# Altium PCB Attenuverter_v1_PCB.PcbDoc
Units mm, origin at the board's own origin, x right, y up, seen from the top; angles counter-clockwise.
Board outline 34 x 105 mm, 2 copper layers (Top Layer, Bottom Layer); 50 components, 34 nets, 149 pads, 66 vias.
Unrouted connection lines stored in the file: 2.
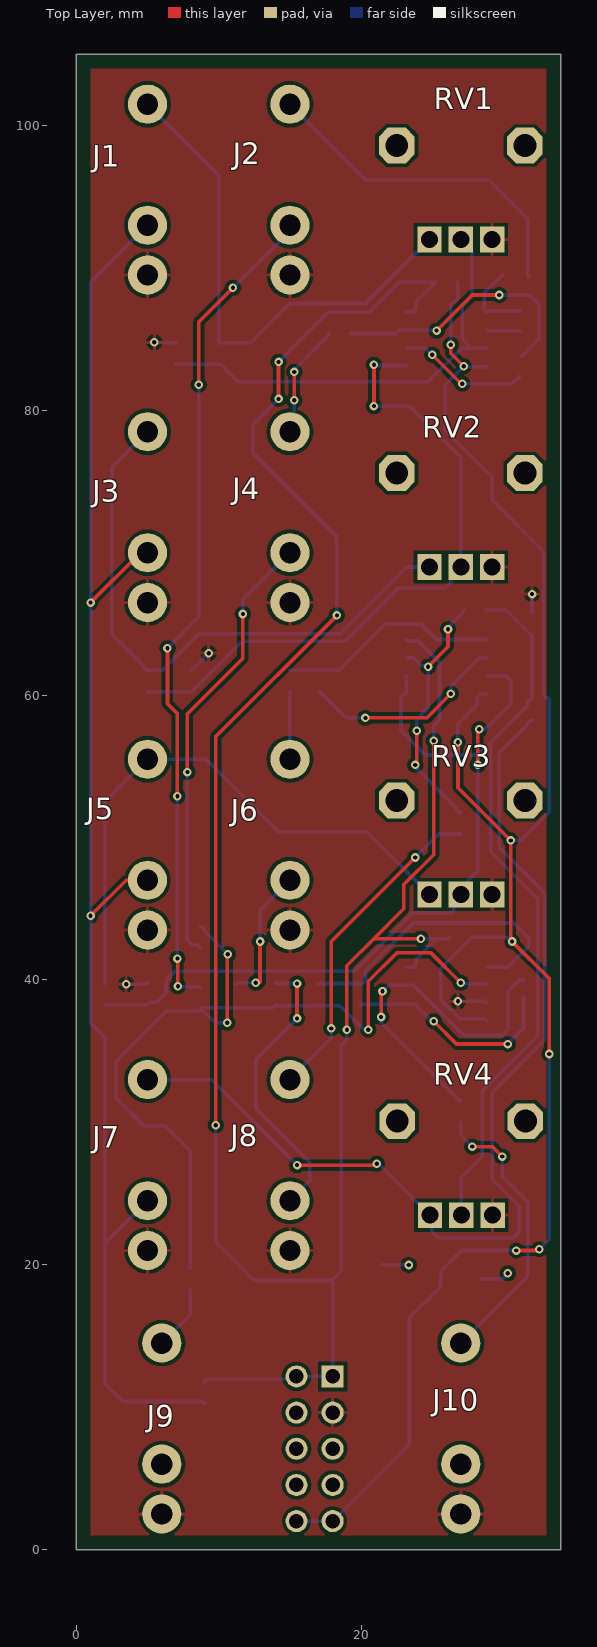
[diagram p0: Top Layer view]
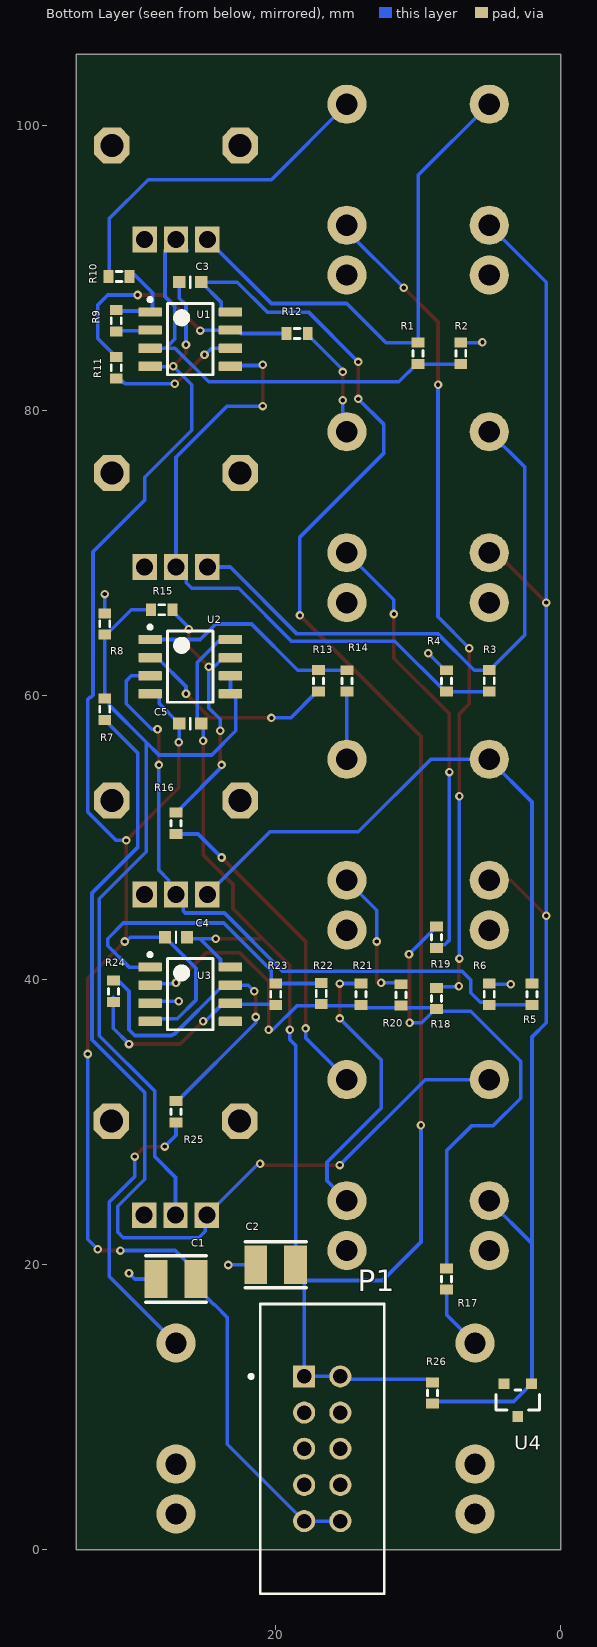
[diagram p1: Bottom Layer view, seen from below]

## Layer stack, top to bottom
Top Solder: solder mask 0.0102, Solder Resist, Dk 3.5
Top Layer: signal copper 0.0356
Dielectric 1: dielectric 0.32, FR-4, Dk 4.8
Bottom Layer: signal copper 0.0356
Bottom Solder: solder mask 0.0102, Solder Resist, Dk 3.5

## Board outline
0,0 0,105 34,105 34,0

## Design rules (kind name [scope] priority, off if disabled: settings)
Clearance [All] p1: gap=0.254 ignorepadtopadclearanceinfootprint=FALSE except(0: Arc-Hole Track-Hole SMDPad-Hole THPad-Hole Via-Hole Fill-Hole Poly-Hole Region-Hole Text-Hole)
PolygonConnect [All] p1: connectstyle=Relief reliefconductorwidth=0.254 reliefentries=4 polygonreliefangle="90 Angle" airgapwidth=0.254
RoutingVias [All] p1: holewidth=0.711 width=1.27 viastyle="Through Hole" minholewidth=0.711 minwidth=1.27 maxholewidth=0.711 maxwidth=1.27
SolderMaskExpansion [All] p1: expansion=0.102 istentingtop=FALSE
Width [All] p1: maxlimit=0.254 minlimit=0.254 preferedwidth=0.254
30 further rules are at their usual default settings.

## Components (designator, comment, footprint, x,y, rotation, side; value= is the part's Value field where it differs from the comment)
C1 "Cap Pol1" SMD-1210C 27,19 r180 bottom value=10u
C2 "Cap Pol1" SMD-1210C 20,20 r0 bottom value=10u
C3 "Cap" SMD-0603C 26,89 r270 bottom value=100n
C4 "Cap" SMD-0603C 27,43 r270 bottom value=100n
C5 "Cap" SMD-0603C 26,58 r270 bottom value=100n
J1 "Audio Jack" "Audio Jack" 5,101.5 r180 top
J2 "Audio Jack" "Audio Jack" 15,101.5 r180 top
J3 "Audio Jack" "Audio Jack" 5,78.5 r180 top
J4 "Audio Jack" "Audio Jack" 15,78.5 r180 top
J5 "Audio Jack" "Audio Jack" 5,55.5 r180 top
J6 "Audio Jack" "Audio Jack" 15,55.5 r180 top
J7 "Audio Jack" "Audio Jack" 5,33 r180 top
J8 "Audio Jack" "Audio Jack" 15,33 r180 top
J9 "Audio Jack" "Audio Jack" 6,14.5 r180 top
J10 "Audio Jack" "Audio Jack" 27,14.5 r180 top
P1 "1-1634688-0" TECO-1-1634688-0-10_V 16.73,7.08 r270 bottom
R1 "Res3" J1-0603 10,84 r90 bottom value=47K
R2 "Res3" J1-0603 7,84 r270 bottom value=47K
R3 "Res3" J1-0603 5,61 r90 bottom value=47K
R4 "Res3" J1-0603 8,61 r270 bottom value=47K
R5 "Res3" J1-0603 2,39 r90 bottom value=47K
R6 "Res3" J1-0603 5,39 r270 bottom value=47K
R7 "Res3" J1-0603 32,59 r270 bottom value=47K
R8 "Res3" J1-0603 32,65 r270 bottom value=47K
R9 "Res3" J1-0603 31.2,86.3 r90 bottom value=100K
R10 "Res3" J1-0603 31,89.4 r0 bottom value=1K
R11 "Res3" J1-0603 31.2,83 r90 bottom value=100K
R12 "Res3" J1-0603 18.5,85.4 r180 bottom value=1K
R13 "Res3" J1-0603 17,61 r90 bottom value=100K
R14 "Res3" J1-0603 15,61 r270 bottom value=1K
R15 "Res3" J1-0603 28,66 r180 bottom value=100K
R16 "Res3" J1-0603 27,51 r270 bottom value=1K
R17 "Res3" J1-0603 8,19 r90 bottom value=100K
R18 "Res3" J1-0603 8.7,38.7 r270 bottom value=100K
R19 "Res3" J1-0603 8.7,43 r90 bottom value=100K
R20 "Res3" J1-0603 11.2,38.95 r270 bottom value=100K
R21 "Res3" J1-0603 14,39 r270 bottom value=100K
R22 "Res3" J1-0603 16.8,39.05 r90 bottom value=100K
R23 "Res3" J1-0603 20,39 r270 bottom value=100K
R24 "Res3" J1-0603 31.4,39.2 r90 bottom value=100K
R25 "Res3" J1-0603 27,30.75 r270 bottom value=1K
R26 "Res3" J1-0603 9,11 r90 bottom value=4.7K
RV1 "RPot" RPOT 27,92 r0 top value=100K
RV2 "RPot" RPOT 27,69 r0 top value=100K
RV3 "RPot" RPOT 27,46 r0 top value=100K
RV4 "RPot" RPOT 27.036,23.487 r0 top value=100K
U1 "TL072CD" D0008A_M 26,85 r180 bottom
U2 "TL072CD" D0008A_M 26,62 r180 bottom
U3 "TL072CD" D0008A_M 26,39 r180 bottom
U4 "LM4040DYM3-2.5-TR" FP-SOT23-3LD-PL-1-MFG 3,10.5 r270 bottom

## Footprints (in the part's own frame and the unit in brackets; to place one, negate y for a bottom-side part, rotate by r counter-clockwise, add the part's x,y. Pads: shape width x height; smd on the part's side, far side on the other; paste and mask are expansions set on the pad)
"Audio Jack" [mm]
  round 2.75 hole 1.5: 1(0,0) 2(0,8.5) 3(0,12)
D0008A_M [mm] "SOIC, 8-Leads, Body 5x4mm, Pitch 1.27mm, IPC Low Density"
  rrect15% 1.65x0.65 smd: 1(-2.825,1.905) 2(-2.825,0.635) 3(-2.825,-0.635) 4(-2.825,-1.905) 5(2.825,-1.905) 6(2.825,-0.635) 7(2.825,0.635) 8(2.825,1.905)
  silkscreen extent -2.95,-2.5 1.6,2.9, body extent -3,-2.45 3,2.45, height 1.63
FP-SOT23-3LD-PL-1-MFG [mm]
  rect 0.76x0.76 smd paste+0 mask+0: 1(-1.145,0.96) 2(-1.145,-0.96) 3(1.145,0)
  silkscreen extent -0.7,-1.52 0.7,1.52, body extent -1.2,-1.46 1.2,1.46, height 1.1
J1-0603 [mm] "Chip Resistor, Body 1.6x0.8mm, IPC High Density"
  rect 0.7x0.9 smd: 1(-0.75,0) 2(0.75,0)
  silkscreen extent -0.2,-0.35 0.2,0.35, body extent -0.85,-0.48 0.85,0.48, height 0.9
RPOT [mm]
  rect 1.7x1.8 hole 1.2: 1(-2.2,0) 2(0,0) 3(2.2,0)
  oct 2.5x2.5 hole 1.6 unplated: 5(-4.5,6.6) 6(4.5,6.6)
SMD-0603C [mm]
  rect 0.85x0.85 smd: 1(0,0.775) 2(0,-0.775)
  silkscreen extent -0.4,0 0.4,0, body extent -0.4,-0.8 0.4,0.8, height 0.9
SMD-1210C [mm]
  rect 1.6x2.7 smd: 1(-1.4,0) 2(1.4,0)
  silkscreen extent -2.12,-1.63 2.12,1.63, body extent -2,-1.22 2,1.27, height 1.7
TECO-1-1634688-0-10_V [mm] "10-Pin Connector, Body 20.35x8.7mm, Pitch 2.54mm"
  rect 1.55x1.55 hole 1.02: 1(-5.08,-1.27)
  round 1.55 hole 1.02: 2(-5.08,1.27) 3(-2.54,-1.27) 4(-2.54,1.27) 5(0,-1.27) 6(0,1.27) 7(2.54,-1.27) 8(2.54,1.27) 9(5.08,-1.27) 10(5.08,1.27)
  silkscreen extent -10.18,-5.13 10.18,4.35, body extent -10.17,-4.35 10.18,4.65, height 9

## Part data
C1 C2: "Polarized Capacitor (Radial)", LatestRevisionDate=17-Jul-2002, LatestRevisionNote="Re-released for DXP Platform.", PackageDescription="Polarized Capacitor (Radial); 2 Leads", PackageReference=RB7.6-15, Published=8-Jun-2000, Publisher="Altium Limited"
C3 C4 C5: "Capacitor", LatestRevisionDate=17-Jul-2002, LatestRevisionNote="Re-released for DXP Platform.", PackageDescription="Radial Cap, Thru-Hole; 2 Leads; 0.3 in Pin Spacing", PackageReference=RAD-0.3, Published=8-Jun-2000, Publisher="Altium Limited"
P1: library part CMP-2000-05854-1, "Male Header, Pitch 2.54 mm, 2 x 5 Postion, Height 9.15 mm, Tail Length 3.2 mm, -40 to 105 degC, RoHS, Bulk", Manufacturer="TE Connectivity", Package Description="10-Pin Connector, Body 20.35 x 8.7 mm, Pitch 2.54 mm", Package Version="Rev. C2, 02/2011", Contact Material=Brass, Contact Plating=GoldPlatedContacts, Contact Termination Type=ThroughHole, Datasheet URL=https://datasheet.ciiva.com/6831/eng-cd-1634688-c2-6831201.pdf, Datasheet Version="Rev. C2, 02/2011", Gender=Header, Manufacturer URL=http://www.te.com/, Mounting Technology=ThroughHole, No. of Contacts=10Contacts, No. of Positions=10, No. of Rows=2, Orientation=Straight, Package Reference=1-1634688-0, Package URL=https://datasheet.ciiva.com/6831/eng-cd-1634688-c2-6831201.pdf, PartNumber=1-1634688-0, Pitch=2.54mm, Pitch Spacing=2.54mm, Product Range=-, SVHC=ToBeAdvised
R1 R2 R3 R4 R5 R6 R7 R8 R9 R10 R11 R12 R13 R14 R15 R16 R17 R18 R19 R20 R21 R22 R23 R24 R25 R26: "Resistor", LatestRevisionDate=29-May-2009, LatestRevisionNote="IPC-7351 Footprint Added.", PackageDescription="Chip Resistor", PackageReference=J1-0603, Published=8-Jun-2000, Publisher="Altium Limited"
RV1 RV2 RV3 RV4: "Potentiometer", LatestRevisionDate=17-Jul-2002, LatestRevisionNote="Re-released for DXP Platform.", PackageDescription="Variable Resistor, Thru-Hole; 3 Leads", PackageReference=VR5, Published=8-Jun-2000, Publisher="Altium Limited", Set Position=0.5, Sim Note="Enter the Resistance value and the set point into parameter fields."
U1 U2 U3: library part CMP-0017-00467-2, "Dual Low-Noise JFET-Input General-Purpose Operational Amplifier, 7 to 36 V, 0 to 70 degC, 8-pin SOIC (D8), Green (RoHS & no Sb/Br)", Manufacturer="Texas Instruments", Rating=Catalog, Total Supply Voltage(Max)(+5V is 5, +/-5V is 10)=36, Total Supply Voltage(Min)(+5V is 5, +/-5V is 10)=7, CMRR(Min)(dB)=70, Code_JEDEC=MS-012, ComponentLink1Description="Manufacturer URL", ComponentLink1URL=http://www.ti.com/, ComponentLink2Description=Datasheet, ComponentLink2URL=http://www.ti.com/lit/ds/symlink/tl072.pdf, ComponentLink3Description="Package Specification", ComponentLink3URL=http://www.ti.com/litv/pdf/msoi002j, DatasheetVersion=SLOS080J, Eco-Plan="Green (RoHS & no Sb/Br)", GBW(Typ)(MHz)=3, IIB(Max)(pA)=200, Iq per channel(Max)(mA)=2.5, Mounting Technology="Surface Mount", Number of Channels=2, Offset Drift(Typ)(uV/C)=18, PackageDescription="8-Pin Plastic Small Outline, Body 4.9 x 3.9 mm, Pitch 1.27 mm", PackageReference=D0008A, PackageVersion="4040047-3/M, 06/2011", PartNumber=TL072CD, Slew Rate(Typ)(V/us)=13, Sub Family="General Purpose Amplifier, High Supply Voltage Amplifier (>=30V)", Vio (25C)(Max)(mV)=10, Vn at 1kHz(Typ)(nV/rtHz)=18
U4: library part CMP-06323-000001-1, "IC VREF SHUNT 1% SOT23-3", Ambient Temperature Range High=+85°C, Ambient Temperature Range Low=-40°C, Manufacturer=Microchip, Max Power Dissipation=306mW, Nominal Supply Current=45uA, Output Voltage=2.5V, Package=SOT23-3LD-PL-1, Temperature="-40°C to +85°C", Automotive=No, Category=IC, ComponentLink2Description=Datasheet, ComponentLink2URL=http://ww1.microchip.com/downloads/en/DeviceDoc/LM4040-41-Precision-Micropower-Shunt-Voltage-Reference-DS20005757B.pdf, Device Class L1="Integrated Circuits (ICs)", Device Class L2="Power Management ICs", Device Class L3="Voltage References", Digikey Description="IC VREF SHUNT 1% SOT23-3", Height=1.11mm, Lead Free=Yes, Manufacturer Part Number=LM4040DYM3-2.5-TR, Mouser Description="LM4040 Series 2.5 V ±1 % Precision Micropower Shunt Voltage Reference - SOT-23", Number Of Outputs=1, Octopart=https://octopart.com/lm4040dym3-2.5-tr-microchip-66800126, Output Type=Fixed, Reference Type=Shunt, RoHS=TRUE, Standoff Height=0.013mm, Temperature Range High=+85°C, Temperature Range Low=-40°C

## Via types
v1: diameter 0.6, hole 0.3, Top Layer to Bottom Layer, 66 vias

## Nets (pads, with @x,y where several pads share a name; then routed paths per layer and width w, separated by ;. In a path a pad name is that pad's centre, name@x,y a point inside that pad or via, vN(x,y) a via of type N, cw(c..) or ccw(c..) an arc to the next point about the centre after c; other vN are vias at no path point)
+5V: J1.2 J3.2 J5.2 J7.2 R26.1 U4.1 | length 105.7
  Top Layer w0.254: v1(1,44.5) 3.5,47 J5.2 ; v1(1,66.5) 4.5,70 J3.2
  Bottom Layer w0.254: U4.1@2,11.645 2,21.5 ; U4.1 3.285,10.4 8.85,10.4 R26.1 ; J7.2 2,21.5 ; J1.2 1,89 v1(1,66.5) v1(1,44.5) 1,37 2,36 2,21.5
+12V: C2.1 C3.1 C4.1 C5.1 P1.1 P1.2 R26.2 U1.8 U2.8 U3.8 | length 168.4
  Top Layer w0.254: v1(9.8,29.8) 9.8,57.1 v1(18.3,65.6) ; v1(14.2,80.8) v1(14.2,83.4) ; v1(19,36.5) 19,41 20.9,42.9 ; v1(24.2,42.9) 20.9,42.9 ; v1(25.1,56.8) 25.1,48.8 23,46.7 23,45 20.9,42.9
  Bottom Layer w0.254: R26.2 9.205,11.955 15.255,11.955 P1.2 P1.1 C2.1@18,18.973 ; v1(9.8,29.8) 9.8,21.6 12.5,18.9 17.927,18.9 C2.1@18,18.973 ; v1(14.2,80.8) 12.4,79 12.4,77 18.3,71.1 v1(18.3,65.6) ; v1(14.2,83.4) 17.7,86.9 20.6,86.9 22.7,89 C3.1 23.836,87.611 23.836,87.103 23.638,86.905 U1.8 ; v1(19,36.5) 19,35.8 18.6,35.4 C2.1 18.6,19.573 C2.1@18,18.973 ; U3.8 23.675,40.905 23.873,41.103 23.873,41.454 25.319,42.9 ; U2.8 23.28,63.8 24,63.8 25.5,62.3 25.5,58.275 C5.1 25.1,57.875 v1(25.1,56.8) ; v1(24.2,42.9) 25.319,42.9 ; C4.1 26.125,42.9 25.319,42.9
-12V: C1.2 C3.2 C4.2 C5.2 P1.9 P1.10 U1.4 U2.4 U3.4 | length 132.5
  Top Layer w0.254: v1(26.3,84.6) 26.3,84 v1(27.2,83.1) ; v1(26.8,56.7) 26.8,53.5 v1(30.5,49.8) 30.5,42.894 30.6,42.794 v1(30.6,42.7) 33.2,40.1 v1(33.2,34.8) ; v1(30.9,21) 32.4,21 v1(32.5,21.1)
  Bottom Layer w0.254: P1.10 P1.9 23.4,7.4 23.4,16.3 24.289,17.189 24.338,17.189 25.6,18.45 C1.2 25.6,19.55 27.05,21 v1(30.9,21) ; v1(26.3,84.6) 26.3,87.4 26.775,87.875 C3.2 ; v1(26.8,56.7) 26.775,56.725 C5.2 28.164,59.389 28.164,59.897 28.362,60.095 U2.4 ; U3.4 28.639,37.281 26.919,37.281 25.6,38.6 25.6,40.825 C4.2 30.206,43 30.506,42.7 v1(30.6,42.7) ; U1.4 28.791,83.061 27.239,83.061 v1(27.2,83.1) 25.9,81.8 25.9,78.6 29.2,75.3 29.2,73.7 32.831,70.069 32.831,59.99 32.98,59.841 33.051,59.841 33.2,59.692 33.2,51.8 31.2,49.8 v1(30.5,49.8) ; v1(32.5,21.1) 33.2,21.8 v1(33.2,34.8)
GND: J1.3 J2.3 J3.3 J4.3 J5.3 J6.3 J7.3 J8.3 J9.3 J10.3 P1.3 R2.1 R4.1 R6.1 R8.1 RV1.3 RV2.3 RV3.3 RV4.3 U3.3 U3.5 U4.2 | length 8.8
  Bottom Layer w0.254: v1(3.5,39.7) 4.95,39.7 R6.1 ; v1@5.4,84.7 5.45,84.75 R2.1 ; R4.1 8.1,61.75 9.29,62.94 v1(9.29,62.952) 9.252,62.952 9,62.7 ; v1(26.8,38.5) 28.69,38.5 U3.3 ; R8.1 v1(32,67.1)
  other v1: 5.48,84.777
NetC1_1: 
NetJ1_1: J1.1 R1.2 RV1.1 | length 37.1
  Top Layer w0.254: J1.1@5,101 J1.1
  Bottom Layer w0.254: J1.1 10,96.5 R1.2 12.25,84.75 15,87.5 20.3,87.5 RV1.1
NetJ2_1: J2.1 R10.2 | length 24.1
  Bottom Layer w0.254: J2.1 20.3,96.2 28.951,96.2 31.7,93.451 31.7,89.45 R10.2
NetJ3_1: J3.1 R3.2 RV2.1 | length 41.7
  Bottom Layer w0.254: J3.1 2.5,76 2.5,64.25 4.677,62.073 4.677,61.973 4.9,61.75 R3.2 6.05,61.75 8.6,64.3 18.5,64.3 23.2,69 RV2.1
NetJ4_1: J4.1 R12.2 | length 8
  Top Layer w0.254: v1(15.3,80.7) v1(15.3,82.7)
  Bottom Layer w0.254: J4.1 15.3,78.8 v1(15.3,80.7) ; v1(15.3,82.7) 15.3,82.85 17.75,85.3 R12.2
NetJ5_1: J5.1 R5.2 RV3.1 | length 40.7
  Bottom Layer w0.254: R5.2 2,52.5 J5.1 9.1,55.5 14.2,50.4 20.4,50.4 RV3.1
NetJ6_1: J6.1 R14.2 | length 4.8
  Bottom Layer w0.254: J6.1 R14.2
NetJ7_1: J7.1 R7.2 RV4.1 | length 72.1
  Top Layer w0.254: v1(15.5,27) 21,27 v1(21.1,27.1)
  Bottom Layer w0.254: J7.1 9.5,33 v1(15.5,27) ; v1@21.161,27.161 RV4.1 24.945,23.378 24.945,22.355 25.4,21.9 30.7,21.9 31.1,22.3 31.1,24.1 29.2,26 29.2,32.1 32.9,35.8 32.9,46.1 29.7,49.3 29.7,55.95 31.677,57.927 31.677,58.027 31.9,58.25 R7.2
NetJ8_1: J8.1 R16.2 | length 23.1
  Top Layer w0.254: v1(17.9,36.6) 17.9,42.7 v1(23.8,48.6)
  Bottom Layer w0.254: J8.1 15,33.05 17.9,35.95 v1(17.9,36.6) ; v1(23.8,48.6) 25.45,50.25 R16.2
NetJ9_1: J9.1 R17.1 | length 4.6
  Bottom Layer w0.254: J9.1 8,16.5 R17.1
NetJ10_1: J10.1 R25.2 | length 20.2
  Top Layer w0.254: v1(27.8,28.3) 29.2,28.3 v1(29.9,27.6)
  Bottom Layer w0.254: J10.1 31.7,19.2 31.7,24.4 29.9,26.2 v1(29.9,27.6) ; R25.2 27,29.1 v1(27.8,28.3)
NetR1_1: R1.1 R2.2 RV1.2 U1.3 | length 32.9
  Bottom Layer w0.254: R2.2 R1.1 10.1,83.25 11.35,82 24.7,82 27.065,84.365 27.735,84.365 ; RV1.2@26.227,91.227 RV1.2 27.773,91.227 27.773,87.973 27.1,87.3 27.1,85 27.735,84.365 ; U1.3 27.735,84.365
NetR3_1: R3.1 R4.2 RV2.2 U1.5 | length 46.4
  Top Layer w0.254: v1(20.9,80.3) v1(20.9,83.2)
  Bottom Layer w0.254: R3.1 R4.2 8.1,60.25 11.642,63.792 18.892,63.792 22.6,67.5 25.9,67.5 26.285,67.885 26.285,68.285 RV2.2 27,76.7 23.4,80.3 v1(20.9,80.3) ; v1(20.9,83.2) 20.953,83.147 23.122,83.147 U1.5
NetR5_1: R5.1 R6.2 RV3.2 U2.3 | length 47.6
  Top Layer w0.254: v1(28.2,55.1) 28.2,57.5 v1(28.3,57.6)
  Bottom Layer w0.254: R5.1 R6.2 5.19,38.44 5.64,38.44 6.3,39.1 6.3,40 6.9,40.6 19.5,40.6 23.6,44.7 26.351,44.7 26.5,44.849 26.5,45.5 RV3.2 27.5,46.5 27.5,47 28.2,47.7 v1(28.2,55.1) ; v1(28.3,57.6) 28.7,57.6 30.5,59.4 30.5,61 30.135,61.365 U2.3
NetR7_1: R7.1 R8.2 R15.1 RV4.2 U2.5 U2.6 | length 61.1
  Bottom Layer w0.254: U2.6 U2.5 22.998,60.095 22.8,59.897 22.8,57.5 24.5,55.8 28.2,55.8 29.1,56.7 ; RV4.2 27.036,26.136 28.5,27.6 28.5,32.2 32.392,36.092 32.392,45.708 29.1,49 29.1,56.7 ; R15.1 30.15,66 31.9,64.25 R8.2 R7.1 31.9,59.75 31.677,59.527 31.677,59.277 29.1,56.7
NetR9_1: R9.1 U1.2 | length 2.4
  Bottom Layer w0.254: U1.2 28.867,85.593 31.158,85.593 R9.1
NetR9_2: R9.2 R10.1 U1.1 | length 5.6
  Bottom Layer w0.254: R10.1@29.9,89.5 28.65,88.25 28.65,87.08 U1.1 28.897,86.977 31.128,86.977 R9.2
NetR11_1: R11.1 U1.6 | length 9.2
  Top Layer w0.254: v1(25,83.9) 27.025,81.875 v1(27.097,81.875)
  Bottom Layer w0.254: U1.6 24.502,84.365 24.967,83.9 v1(25,83.9) ; v1(27.097,81.875) 30.575,81.875 R11.1@31.025,82.325 ; R11.1@31.1,82.25 R11.1@31.1,82.4
NetR11_2: R11.2 R12.1 U1.7 | length 18.9
  Top Layer w0.254: v1(25.3,85.6) 27.8,88.1 v1(29.7,88.1)
  Bottom Layer w0.254: R12.1 22.44,85.4 22.675,85.635 U1.7 23.192,85.617 25.282,85.617 v1(25.3,85.6) ; v1(29.7,88.1) 31.8,88.1 32.5,87.4 32.5,85.05 R11.2
NetR13_1: R13.1 U2.2 | length 14.6
  Top Layer w0.254: v1(20.3,58.4) 24.6,58.4 v1(26.3,60.1)
  Bottom Layer w0.254: R13.1 17.1,60.25 18.95,58.4 v1(20.3,58.4) ; v1(26.3,60.1) 26.3,60.61 28.325,62.635 U2.2
NetR13_2: R13.2 R14.1 U2.1 | length 15.6
  Bottom Layer w0.254: R14.1 R13.2 18.45,61.75 21.7,65 24.2,65 25.295,63.905 U2.1
NetR15_2: R15.2 R16.1 U2.7 | length 19
  Top Layer w0.254: v1(23.8,55.1) 23.9,55.2 v1(23.9,57.5) ; v1(24.7,62) 26.1,63.4 v1(26.1,64.625)
  Bottom Layer w0.254: U2.7 23.675,62.635 24.244,62.066 24.634,62.066 v1(24.7,62) 24.7,59.1 23.9,58.3 v1(23.9,57.5) ; v1(23.8,55.1) 23.8,54.95 26.677,52.073 26.677,51.973 26.9,51.75 R16.1 ; v1@26.1,64.5 v1(26.1,64.625) 26.1,64.75 27.25,65.9 R15.2
NetR17_2: R17.2 R18.2 R19.2 R20.2 R21.2 R22.1 U3.2 | length 61
  Top Layer w0.254: v1(10.6,37) 10.6,41.771 v1(10.639,41.811) ; v1(20.5,36.5) 20.5,39.9 22.5,41.9 24.9,41.9 v1(27,39.8)
  Bottom Layer w0.254: R17.2 8,28 6.25,29.75 4.75,29.75 2.8,31.7 2.8,34.3 6.3,37.8 R18.2@8.7,37.8 ; R19.2 8.8,43.75 9.023,43.527 9.023,43.427 v1(10.639,41.811) ; v1(10.6,37) 9.75,37 8.8,37.95 R18.2 8.8,38.05 11.5,38.05 13.8,38.05 R21.2 14.05,38.2 16.95,38.2 17,38.25 17.05,38.2 18.5,38.2 20.2,36.5 v1(20.5,36.5) ; v1(27,39.8) 27.066,39.734 28.726,39.734 U3.2
NetR22_2: R22.2 R23.1 U3.1 | length 21.5
  Bottom Layer w0.254: R22.2@17,39.75 R23.1 20.1,39.75 20.323,39.973 20.323,40.673 23.65,44 30.7,44 31.8,42.9 31.8,42.4 30.305,40.905 U3.1
NetR23_2: R23.2 R24.1 U3.6 | length 15.2
  Top Layer w0.254: v1(25.1,37.1) 26.7,35.5 v1(30.3,35.5)
  Bottom Layer w0.254: R23.2 20.057,38.308 23.732,38.308 24.874,37.166 25.034,37.166 v1(25.1,37.1) ; v1(30.3,35.5) 31.4,36.6 R24.1@31.4,38.787
NetR24_2: R24.2 R25.1 U3.7 | length 24.9
  Top Layer w0.254: v1(21.4,37.4) 21.4,39.1 v1(21.5,39.2)
  Bottom Layer w0.254: v1(21.4,37.4) 21.4,37 26.9,31.5 R25.1 ; v1(21.5,39.2) 21.935,39.635 23.675,39.635 27.11,36.2 27.2,36.2 27.3,36.1 29.9,36.1 30.3,36.5 30.3,39.2 31.1,40 R24.2@31.4,40
SUM1: J2.2 R18.1 | length 58.9
  Top Layer w0.254: v1(6.4,63.3) 6.4,59.4 7.1,58.7 v1(7.1,52.9) ; v1(7.1,41.5) 7.133,41.467 v1(7.133,39.567) ; v1(8.6,81.8) 8.6,86.2 v1(11,88.6)
  Bottom Layer w0.254: v1(6.4,63.3) 8.6,65.5 v1(8.6,81.8) ; v1(7.1,41.5) v1(7.1,52.9) ; v1(7.133,39.567) 7.166,39.534 8.616,39.534 R18.1 ; v1(11,88.6) 15,92.6 J2.2
SUM2: J4.2 R19.1 | length 31.3
  Top Layer w0.254: v1(7.8,54.6) 7.8,58.7 11.7,62.6 v1(11.7,65.7)
  Bottom Layer w0.254: v1(7.8,54.6) 7.8,42.8 8.127,42.473 8.477,42.473 R19.1 ; v1(11.7,65.7) 11.7,66.7 J4.2
SUM3: J6.2 R20.1 | length 9.7
  Top Layer w0.254: v1@12.75,39.7 12.9,39.85 v1(12.9,42.7)
  Bottom Layer w0.254: R20.1 11.3,39.8 v1(12.6,39.8) ; v1(12.9,42.7) 12.9,44.9 J6.2
SUM4: J8.2 R21.1 | length 20.1
  Top Layer w0.254: v1(15.5,37.3) v1(15.5,39.75)
  Bottom Layer w0.254: R21.1 v1(15.5,39.75) ; J8.2 16.4,25.9 16.4,27.2 12.6,31 12.6,34.4 v1(15.5,37.3)
pads on no net: C1.1 C2.2 J9.2 J10.2 P1.4 P1.5 P1.6 P1.7 P1.8 RV1.5 RV1.6 RV2.5 RV2.6 RV3.5 RV3.6 RV4.5 RV4.6 U4.3
copper on no net: | length 4
  Bottom Layer w0.254: 21.4,20 23.321,20 v1(23.336,19.985) ; 28.4,19 29.9,19 v1(30.3,19.4)

## Polygon pours and split planes (outlines as drawn)
GND on Top Layer "GND_L01_P003" (solid, remove dead copper, pour order 3): 1,1 1,104 33,104 33,1
no net on Top Layer "NONET_L01_P000" (solid, remove dead copper, pour order 0): 0,0

## Silkscreen, mask and mechanical layers (free items; w line width, h text height)
Mechanical 1:
  the board outline again, w0.254